# Altium PCB PCB_QH.PcbDoc
Units mm, origin at the board's own origin, x right, y up, seen from the top; angles counter-clockwise.
Board outline 180.28 x 98.81 mm, 2 copper layers (Top Layer, Bottom Layer); 73 components, 61 nets, 225 pads, 177 vias.
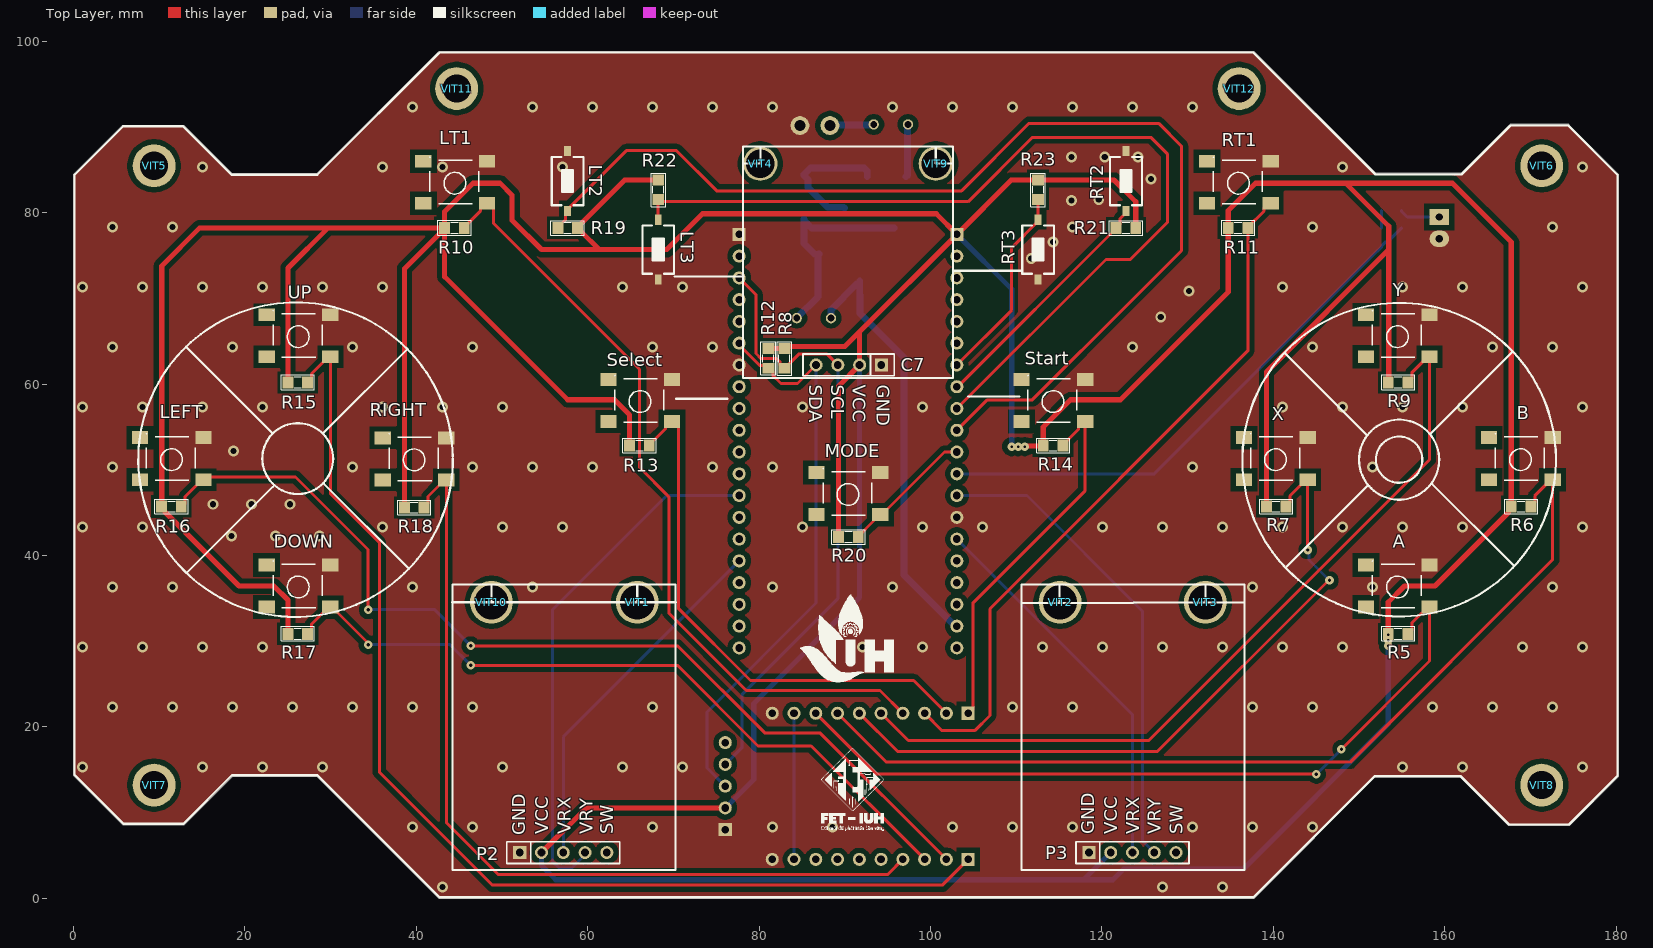
[diagram p0: Top Layer view]
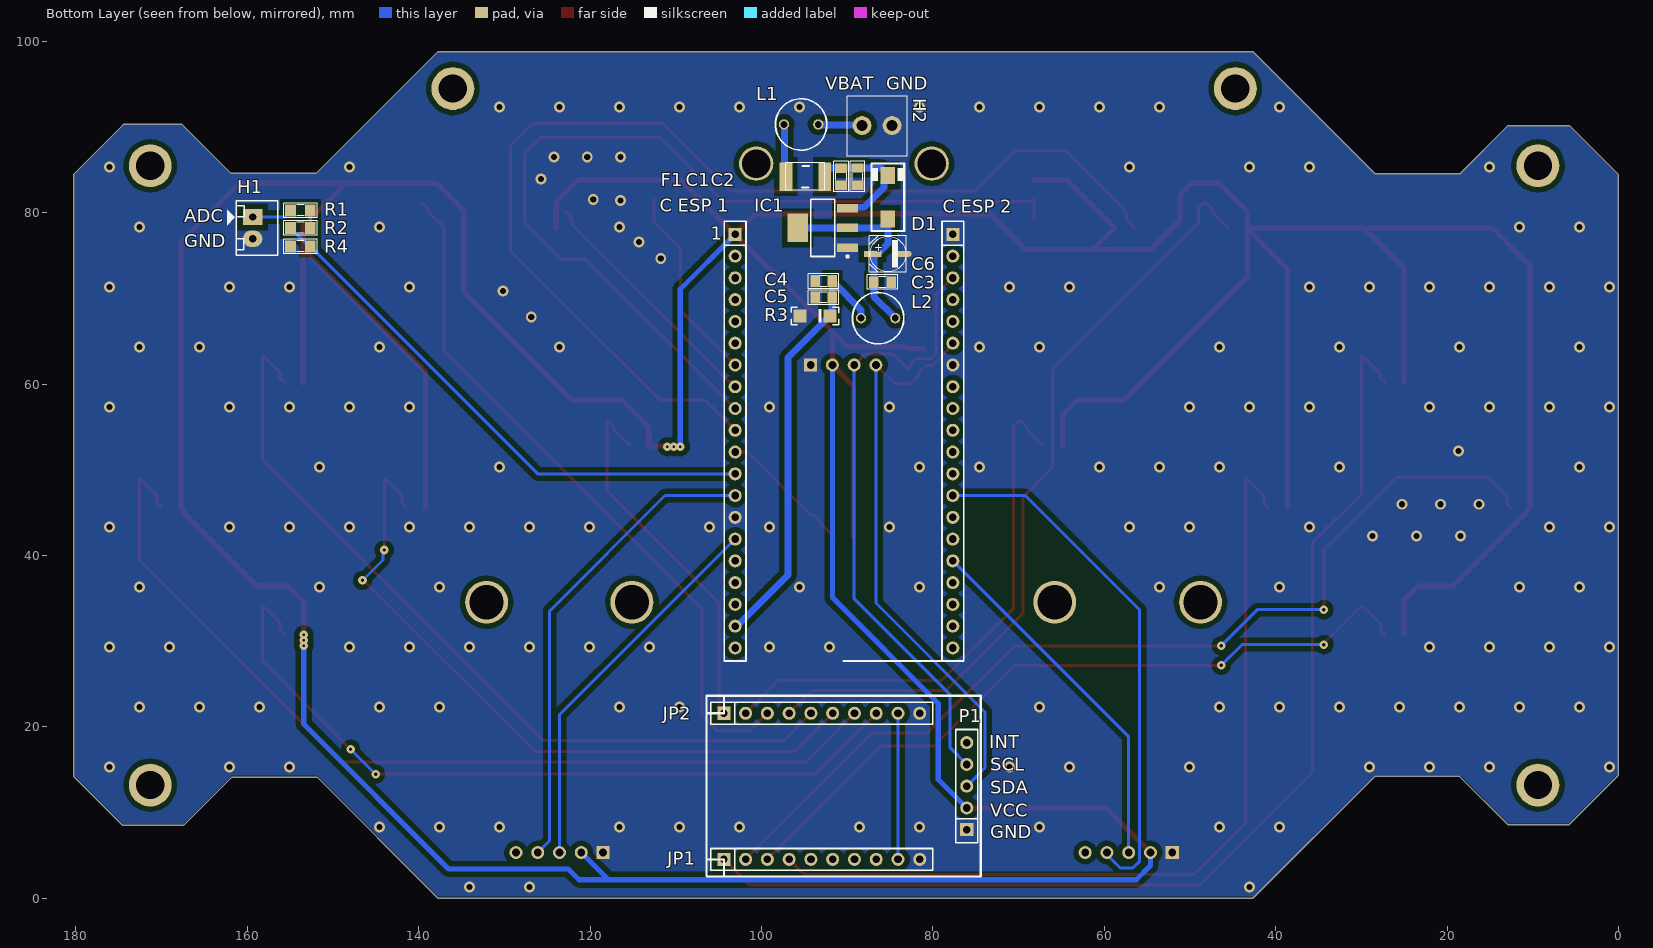
[diagram p1: Bottom Layer view, seen from below]
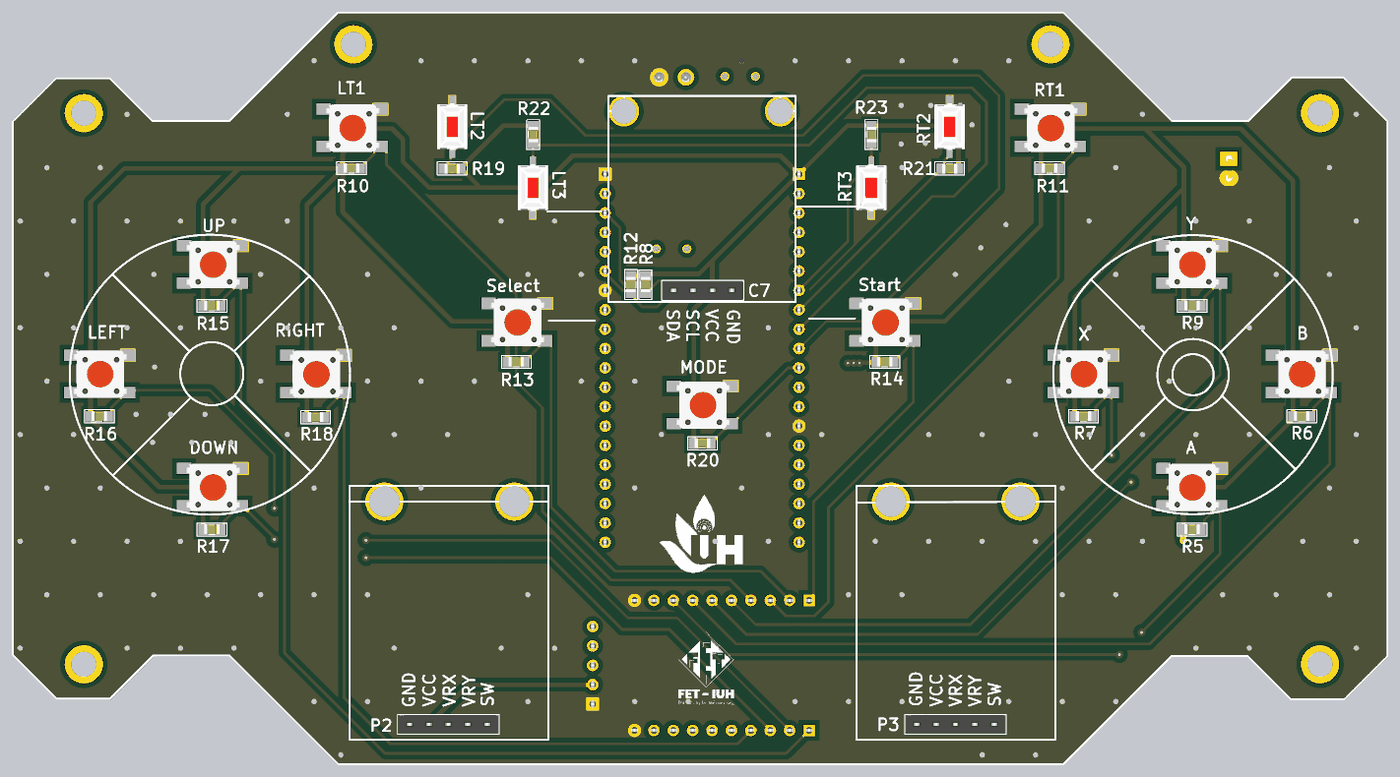
[diagram p2: 3D render of the assembled board from above, using the file's embedded part models]
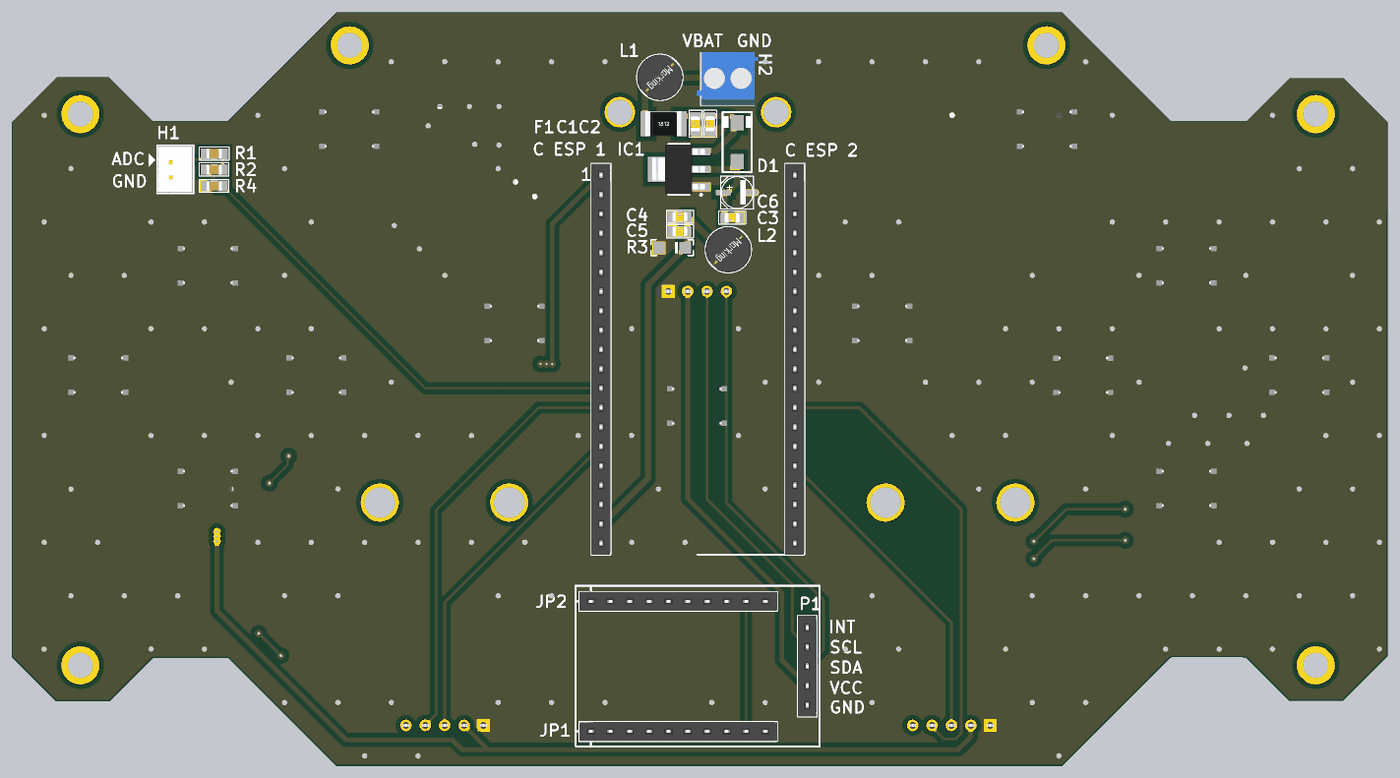
[diagram p3: 3D render of the assembled board from below, using the file's embedded part models]

## Layer stack, top to bottom
Top Solder: solder mask 0.0102, Solder Resist, Dk 3.5
Top Layer: signal copper 0.0356
Dielectric 1: dielectric 0.32, FR-4, Dk 4.8
Bottom Layer: signal copper 0.0356
Bottom Solder: solder mask 0.0102, Solder Resist, Dk 3.5

## Board outline
5.764,8.587 12.905,8.587 18.542,14.224 28.448,14.224 42.672,0 137.733,0 151.882,14.149 161.777,14.149 167.431,8.495 174.545,8.495 180.279,14.23 180.279,84.467 174.455,90.291 167.624,90.291 161.911,84.579 151.978,84.579 137.752,98.805 42.671,98.805 28.415,84.549 18.5,84.549 12.879,90.17 5.715,90.17 0,84.455 0,14.351

## Design rules (kind name [scope] priority, off if disabled: settings)
Clearance [All] p1: gap=0.16 ignorepadtopadclearanceinfootprint=FALSE
PolygonConnect PolygonConnect_11 [All vs IsNamedPolygon('GND_L02_P001')] p1: connectstyle=Direct reliefconductorwidth=0.254 reliefentries=4 polygonreliefangle="90 Angle" airgapwidth=0.254
PolygonConnect PolygonConnect_10 [All vs IsNamedPolygon('GND_L01_P000')] p2: connectstyle=Direct reliefconductorwidth=0.254 reliefentries=4 polygonreliefangle="90 Angle" airgapwidth=0.254
PolygonConnect PolygonConnect_9 [All vs IsNamedPolygon('GND_L02_P001')] p3: connectstyle=Direct reliefconductorwidth=0.254 reliefentries=4 polygonreliefangle="90 Angle" airgapwidth=0.254
PolygonConnect PolygonConnect_8 [All vs IsNamedPolygon('GND_L01_P000')] p4: connectstyle=Direct reliefconductorwidth=0.254 reliefentries=4 polygonreliefangle="90 Angle" airgapwidth=0.254
PolygonConnect PolygonConnect_7 [All vs IsNamedPolygon('GND_L01_P000')] p5: connectstyle=Direct reliefconductorwidth=0.254 reliefentries=4 polygonreliefangle="90 Angle" airgapwidth=0.254
PolygonConnect PolygonConnect_6 [All vs IsNamedPolygon('GND_L01_P000')] p6: thpad.connectstyle=Direct thpad.reliefconductorwidth=0.254 thpad.reliefentries=4 thpad.polygonreliefangle="90 Angle" thpad.airgapwidth=0.254 smdpad.connectstyle=Direct smdpad.reliefconductorwidth=0.254 smdpad.reliefentries=4 smdpad.polygonreliefangle="90 Angle" smdpad.airgapwidth=0.254 via.connectstyle=Relief via.reliefconductorwidth=0.254 via.reliefentries=4 via.polygonreliefangle="90 Angle" via.airgapwidth=0.254
PolygonConnect 1 [All vs IsNamedPolygon('GND_L01_P000')] p7: thpad.connectstyle=Direct thpad.reliefconductorwidth=0.254 thpad.reliefentries=4 thpad.polygonreliefangle="90 Angle" thpad.airgapwidth=0.254 smdpad.connectstyle=Direct smdpad.reliefconductorwidth=0.254 smdpad.reliefentries=4 smdpad.polygonreliefangle="90 Angle" smdpad.airgapwidth=0.254 via.connectstyle=Relief via.reliefconductorwidth=0.254 via.reliefentries=4 via.polygonreliefangle="90 Angle" via.airgapwidth=0.254
PolygonConnect PolygonConnect_5 [All vs IsNamedPolygon('GND_L01_P000')] p8: thpad.connectstyle=Direct thpad.reliefconductorwidth=0.254 thpad.reliefentries=4 thpad.polygonreliefangle="90 Angle" thpad.airgapwidth=0.254 smdpad.connectstyle=Direct smdpad.reliefconductorwidth=0.254 smdpad.reliefentries=4 smdpad.polygonreliefangle="90 Angle" smdpad.airgapwidth=0.254 via.connectstyle=Relief via.reliefconductorwidth=0.254 via.reliefentries=4 via.polygonreliefangle="90 Angle" via.airgapwidth=0.254
PolygonConnect PolygonConnect_4 [All vs IsNamedPolygon('GND_L02_P001')] p9: thpad.connectstyle=Direct thpad.reliefconductorwidth=0.254 thpad.reliefentries=4 thpad.polygonreliefangle="90 Angle" thpad.airgapwidth=0.254 smdpad.connectstyle=Direct smdpad.reliefconductorwidth=0.254 smdpad.reliefentries=4 smdpad.polygonreliefangle="90 Angle" smdpad.airgapwidth=0.254 via.connectstyle=Relief via.reliefconductorwidth=0.254 via.reliefentries=4 via.polygonreliefangle="90 Angle" via.airgapwidth=0.254
PolygonConnect PolygonConnect_3 [All vs IsNamedPolygon('GND_L01_P000')] p10: thpad.connectstyle=Direct thpad.reliefconductorwidth=0.254 thpad.reliefentries=4 thpad.polygonreliefangle="90 Angle" thpad.airgapwidth=0.254 smdpad.connectstyle=Direct smdpad.reliefconductorwidth=0.254 smdpad.reliefentries=4 smdpad.polygonreliefangle="90 Angle" smdpad.airgapwidth=0.254 via.connectstyle=Relief via.reliefconductorwidth=0.254 via.reliefentries=4 via.polygonreliefangle="90 Angle" via.airgapwidth=0.254
PolygonConnect PolygonConnect_2 [All vs IsNamedPolygon('GND_L02_P001')] p11: thpad.connectstyle=Direct thpad.reliefconductorwidth=0.254 thpad.reliefentries=4 thpad.polygonreliefangle="90 Angle" thpad.airgapwidth=0.254 smdpad.connectstyle=Direct smdpad.reliefconductorwidth=0.254 smdpad.reliefentries=4 smdpad.polygonreliefangle="90 Angle" smdpad.airgapwidth=0.254 via.connectstyle=Relief via.reliefconductorwidth=0.254 via.reliefentries=4 via.polygonreliefangle="90 Angle" via.airgapwidth=0.254
PolygonConnect PolygonConnect_1 [All vs IsNamedPolygon('GND_L01_P000')] p12: thpad.connectstyle=Direct thpad.reliefconductorwidth=0.254 thpad.reliefentries=4 thpad.polygonreliefangle="90 Angle" thpad.airgapwidth=0.254 smdpad.connectstyle=Direct smdpad.reliefconductorwidth=0.254 smdpad.reliefentries=4 smdpad.polygonreliefangle="90 Angle" smdpad.airgapwidth=0.254 via.connectstyle=Relief via.reliefconductorwidth=0.254 via.reliefentries=4 via.polygonreliefangle="90 Angle" via.airgapwidth=0.254
PolygonConnect [All] p13: connectstyle=Relief reliefconductorwidth=0.254 reliefentries=4 polygonreliefangle="90 Angle" airgapwidth=0.254
RoutingVias [All] p1: holewidth=0.711 width=1.27 viastyle="Through Hole" minholewidth=0.711 minwidth=1.27 maxholewidth=0.711 maxwidth=1.27
SolderMaskExpansion [All] p1: expansion=0.102 istentingtop=FALSE
Width 3V3 [InNet('+3V3')] p1: maxlimit=0.8 minlimit=0.254 preferedwidth=0.6
Width [All] p2: maxlimit=0.8 minlimit=0.254 preferedwidth=0.35
30 further rules are at their usual default settings.

## Components (designator, comment, footprint, x,y, rotation, side; value= is the part's Value field where it differs from the comment)
A "SW" "SW4 - SMD" 157.734,34.163 r180 top value="Button chip 4 pin" (schematic designator A1)
B "SW" "SW4 - SMD" 172.093,49.022 r180 top value="Button chip 4 pin" (schematic designator B1)
C1 "10uF/25V" CN-SMD-0805 90.709,84.201 r90 bottom value=33pF
C2 "0.1uF/25V" CN-SMD-0805 88.804,84.217 r90 bottom value=33pF
C3 "0.1uF/16V" CN-SMD-0805 85.883,71.882 r0 bottom value=33pF
C4 "4.7uF/16V" CN-SMD-0805 92.741,72.009 r180 bottom value=33pF
C5 "0.1uF/16V" CN-SMD-0805 92.741,70.104 r180 bottom value=33pF
C6 "22uF/16V" CAP-ALU-SMD-5.5x5.5 85.248,75.184 r180 bottom
C7 "Header4" JP4-C1T 94.265,62.23 r180 top
"C ESP 1" "JP21" JP20-C1T 103.077,77.47 r270 bottom
"C ESP 2" "JP22" JP20-C1T 77.678,77.47 r270 bottom
D1 "1N5819/SS14" SMA 85.248,81.788 r90 bottom
DOWN "SW" "SW4 - SMD" 29.464,34.163 r180 top value="Button chip 4 pin" (schematic designator DPAD_DOWN1)
F1 "1.5A 5x20" RES-SMD-1812 95.154,84.201 r180 bottom value=Fuse
H1 "Header2" Header2 159.385,79.502 r270 bottom
H2 "Header2" KF2-3.5 86.518,90.17 r180 bottom
IC1 "AMS1117-5V" SOT223-4N 92.868,78.232 r0 bottom
JP1 "JP10" JP10-C1T 104.394,4.54 r180 bottom value="Connector 10"
JP2 "JP10" JP10-C1T 104.394,21.59 r180 bottom value="Connector 10"
L1 "Ferrite bead 3A" L-DIP-M-6.0 95.376,90.297 r0 bottom value="150 mH"
L2 "1000Ohm" L-DIP-M-6.0 86.391,67.691 r0 bottom value="150 mH"
LEFT "SW" "SW4 - SMD" 14.673,49.022 r180 top value="Button chip 4 pin" (schematic designator DPAD_LEFT1)
LT1 "SW" "SW4 - SMD" 47.752,81.28 r180 top value="Button chip 4 pin"
LT2 "SW" SW-SMD 57.658,83.693 r90 top value="SW chip 2 pin"
LT3 "SW" SW-SMD 68.23,75.692 r270 top value="SW chip 2 pin" (schematic designator CT1)
MODE "SW" "SW4 - SMD" 93.63,44.958 r180 top value="Button chip 4 pin" (schematic designator MODE1)
P1 "Header 5" JP5-C1T 76.049,8.001 r90 bottom
P2 "Header 5" JP5-C1T 52.07,5.334 r0 top
P3 "Header 5" JP5-C1T 118.491,5.334 r0 top
R1 "3k" SM-0805 153.797,80.264 r0 bottom value="R1/4W - 1K"
R2 "`3k" SM-0805 153.797,78.232 r180 bottom value="R1/4W - 1K"
R3 "Z 6.3V" 1N4148_SMD 93.757,67.945 r180 bottom
R4 "4k7" SM-0805 153.797,76.073 r180 bottom value="R1/4W - 1K"
R5 "330" SM-0805 154.559,30.861 r180 top value="R1/4W - 1K"
R6 "330" SM-0805 168.91,45.72 r180 top value="R1/4W - 1K"
R7 "330" SM-0805 140.335,45.72 r180 top value="R1/4W - 1K"
R8 "4k7" SM-0805 82.936,62.992 r90 top value="R1/4W - 1K"
R9 "330" SM-0805 154.559,60.198 r180 top value="R1/4W - 1K"
R10 "330" SM-0805 44.45,78.232 r180 top value="R1/4W - 1K"
R11 "330" SM-0805 135.89,78.232 r180 top value="R1/4W - 1K"
R12 "4k7" SM-0805 81.082,62.992 r270 top value="R1/4W - 1K"
R13 "330" SM-0805 66.04,52.832 r180 top value="R1/4W - 1K"
R14 "330" SM-0805 114.3,52.832 r180 top value="R1/4W - 1K"
R15 "330" SM-0805 26.162,60.198 r180 top value="R1/4W - 1K"
R16 "330" SM-0805 11.43,45.72 r180 top value="R1/4W - 1K"
R17 "330" SM-0805 26.162,30.861 r180 top value="R1/4W - 1K"
R18 "330" SM-0805 39.751,45.593 r180 top value="R1/4W - 1K"
R19 "330" SM-0805 57.658,78.232 r0 top value="R1/4W - 1K"
R20 "330" SM-0805 90.424,42.164 r180 top value="R1/4W - 1K"
R21 "330" SM-0805 122.809,78.232 r0 top value="R1/4W - 1K"
R22 "330" SM-0805 68.23,82.677 r90 top value="R1/4W - 1K"
R23 "330" SM-0805 112.553,82.677 r90 top value="R1/4W - 1K"
RIGHT "SW" "SW4 - SMD" 42.994,48.997 r180 top value="Button chip 4 pin" (schematic designator DPAD_RIGHT1)
RT1 "SW" "SW4 - SMD" 139.192,81.28 r180 top value="Button chip 4 pin"
RT2 "SW" SW-SMD 122.809,83.693 r90 top value="SW chip 2 pin"
RT3 "SW" SW-SMD 112.553,75.692 r270 top value="SW chip 2 pin" (schematic designator CT2)
Select "SW" "SW4 - SMD" 69.342,55.804 r180 top value="Button chip 4 pin" (schematic designator Select1)
Start "SW" "SW4 - SMD" 117.543,55.804 r180 top value="Button chip 4 pin" (schematic designator Start1)
UP "SW" "SW4 - SMD" 29.464,63.373 r180 top value="Button chip 4 pin" (schematic designator DPAD_UP1)
VIT1 "1" VIT#1 65.786,34.544 r0 top
VIT2 "1" VIT#1 115.117,34.544 r0 top
VIT3 "1" VIT#1 132.08,34.544 r0 top
VIT4 "1" VIT#2 80.136,85.725 r0 top
VIT5 "1" VIT#3 9.398,85.471 r0 top
VIT6 "1" VIT#3 171.323,85.471 r0 top
VIT7 "1" VIT#3 9.398,13.208 r0 top
VIT8 "1" VIT#3 171.323,13.208 r0 top
VIT9 "1" VIT#2 100.615,85.725 r0 top
VIT10 "1" VIT#1 48.768,34.544 r0 top
VIT11 "1" VIT#3 44.704,94.488 r0 top
VIT12 "1" VIT#3 136.017,94.488 r0 top
X "SW" "SW4 - SMD" 143.518,49.022 r180 top value="Button chip 4 pin" (schematic designator X1)
Y "SW" "SW4 - SMD" 157.734,63.373 r180 top value="Button chip 4 pin" (schematic designator Y1)

## Footprints (in the part's own frame and the unit in brackets; to place one, negate y for a bottom-side part, rotate by r counter-clockwise, add the part's x,y. Pads: shape width x height; smd on the part's side, far side on the other; paste and mask are expansions set on the pad)
1N4148_SMD [mil]
  rect 60x60 smd: 1(-67.91,0) 2(67.91,0)
  silkscreen extent -109,-40 109,41, body extent -71,-23 67,25, height 47
CAP-ALU-SMD-5.5x5.5 [mm]
  rect 2x0.7 smd: 1(-1.778,0)
  oval 2x0.7 smd: 2(1.778,0)
  silkscreen extent -2.15,-2.15 2.15,2.15, body extent -2.3,-2.15 2.3,2.15, height 5.4
CN-SMD-0805 [mm]
  rect 1.1x1.397 smd: 1(-1,0) 2(1,0)
  silkscreen extent -1.78,-0.86 1.78,0.84, body extent -1,-0.62 1,0.63, height 0.8
Header2 [mil] "CON2"
  rect 75x90 hole 34: 1(0,0)
  oval 75x90 hole 34: 2(100,0)
  silkscreen extent -75,-118 175,115, body extent -68,-70 168,107, height 236
JP4-C1T [mm] "4 row, straight, gold plating"
  rect 1.52x1.52 hole 0.9: 1(0,0)
  round 1.52 hole 0.9: 2(2.54,0) 3(5.08,0) 4(7.62,0)
  silkscreen extent -1.52,-1.27 9.14,1.27, body extent -1.52,-1.25 9.14,1.25, height 8.51
JP5-C1T [mm] "5 row, straight, gold plating"
  rect 1.52x1.52 hole 0.9: 1(0,0)
  round 1.52 hole 0.9: 2(2.54,0) 3(5.08,0) 4(7.62,0) 5(10.16,0)
  silkscreen extent -1.52,-1.27 11.68,1.27, body extent -1.52,-1.25 11.68,1.25, height 8.51
JP10-C1T [mm] "10 row, straight, gold plating"
  rect 1.52x1.52 hole 0.9: 1(0,0)
  round 1.52 hole 0.9: 2(2.54,0) 3(5.08,0) 4(7.62,0) 5(10.16,0) 6(12.7,0) 7(15.24,0) 8(17.78,0) 9(20.32,0) 10(22.86,0)
  silkscreen extent -1.52,-1.27 24.38,1.27, body extent -1.52,-1.25 24.38,1.25, height 8.51
JP20-C1T [mm] "20 row, straight, gold plating"
  rect 1.52x1.52 hole 0.9: 1(0,0)
  round 1.52 hole 0.9: 2(2.54,0) 3(5.08,0) 4(7.62,0) 5(10.16,0) 6(12.7,0) 7(15.24,0) 8(17.78,0) 9(20.32,0) 10(22.86,0) 11(25.4,0) 12(27.94,0) 13(30.48,0) 14(33.02,0) 15(35.56,0) 16(38.1,0) 17(40.64,0) 18(43.18,0) 19(45.72,0) 20(48.26,0)
  silkscreen extent -1.52,-1.27 49.78,1.27, body extent -1.52,-1.25 49.78,1.25, height 8.51
KF2-3.5 [mm] "3,50mm - modular - blue - Horizontal wire entry - Pressure clamp - 8,4mm height - 02p"
  round 2.2 hole 1.3: 1(-1.75,0) 2(1.75,0)
  silkscreen extent -3.5,-3.6 3.5,3.4, body extent -3.95,-3.6 4.05,3.4, height 8.41
L-DIP-M-6.0 [mm] "THT Inductor, 2-Leads, Body 6,0  mm"
  round 1.2 hole 0.8: 1(-2,0) 2(2,0)
  silkscreen extent -3,-3 3,3, body extent -4.17,-4.17 4.17,4.17, height 6.51
RES-SMD-1812 [mm] "Chip Capacitor, Body 3.2x2.5mm, IPC Medium Density"
  rect 1.5x3.3 smd: 1(-1.996,0) 2(2.54,0)
  silkscreen extent -2.04,-1.6 2.54,1.6, body extent -2,-1.6 2.5,1.6, height 0.6
SM-0805 [mil] "Compoment SMD 80x50mil"
  rect 50x55 smd: 1(-45,0) 2(45,0)
  silkscreen extent -77,-34 76,33, body extent -40,-27 40,23, height 24
SMA [mm]
  rect 2x1.7 smd: 1(-2.544,0) 2(2.544,0)
  silkscreen extent -3.94,-1.9 3.94,1.91, body extent -2.87,-1.4 2.87,1.4, height 2.29
SOT223-4N [mm] "SOT223, 4-Leads, Body 6.5x3.5mm, Pitch 2.3mm, Lead Span 7mm, IPC Medium Density"
  rect 2.4x1 smd: 1(-2.9,2.3) 2(-2.9,0) 3(-2.9,-2.3)
  rect 2.4x3.3 smd: 4(2.9,0)
  silkscreen extent -3.02,-3.35 1.4,3.47, body extent -3.39,-3.27 3.5,3.23, height 1.72
"SW4 - SMD" [mm] "SW button 4pin, 250 x250 mil"
  rect 1.905x1.5 smd: 1(-0.5,0.178) 2(6.926,0.178) 3(-0.5,-4.724) 4(6.926,-4.724)
  silkscreen extent 0.46,-5.21 6.17,0.25, body extent -0.83,-5.33 7.07,0.87, height 7
SW-SMD [mm] "Switch SMD type"
  rect 1.2x0.8 smd: 1(-3.5,0) 2(3.5,0)
  silkscreen extent -2.82,-1.85 2.82,1.85, body extent -3.05,-1.85 3.05,1.85, height 2.5
VIT#1 [mm] "VIT"
  round 5 hole 4: VIT1(0,0)
VIT#2 [mm] "VIT"
  round 4 hole 3.3: VIT1(0,0)
VIT#3 [mm] "VIT"
  round 5 hole 3.3: VIT1(0,0)

## Part data
A B DOWN LEFT LT1 MODE RIGHT RT1 Select Start UP X Y: library part SW4, "Switch button 4 pin"
C1 C2 C3 C4 C5: library part CN
C6: library part CN-ALU-SMD, "Polarized Capacitor (Axial)", LatestRevisionDate=17-Jul-2002, LatestRevisionNote="Re-released for DXP Platform.", PackageReference=POLAR0.8, Published=8-Jun-2000, Publisher="Altium Limited"
C7: "Header IDC, 4 x 1 Pin Vertical 2.54mm Pitch (Non-Boxed, Male)", Manufacturer="W¨¹rth Elektronik eiSos GmbH", partNo=613002143121, ComponentLink1 Description=Manufacturer, ComponentLink1URL=http://www.we-online.com, ComponentLink2 Description=Datasheet, ComponentLink2URL=http://katalog.we-online.de/em/datasheet/6130xx143121.pdf, Created by="Karrer Zheng", Created Date="29 March 2013", NoPins=02
"C ESP 1" "C ESP 2": library part JP20, "WR-PHD 2.54 mm Angled Socket Header", Manufacturer="W¨¹rth Elektronik eiSos GmbH", partNo=613020143121, ComponentLink1 Description=Manufacturer, ComponentLink1URL=http://www.we-online.com, ComponentLink2 Description=Datasheet, ComponentLink2URL=http://katalog.we-online.de/em/datasheet/6130xx143121.pdf, Created by="Karrer Zheng", Created Date="29 March 2013", NoPins=20
D1: library part "Diode Zener SMD"
F1: library part Fuse, "Fuse", Designed by=VanDungEvn
H1 H2: "Header IDC, 2 x 1 Pin Vertical 2.54mm Pitch (Non-Boxed, Male)", Manufacturer="W¨¹rth Elektronik eiSos GmbH", partNo=613002143121, ComponentLink1 Description=Manufacturer, ComponentLink1URL=http://www.we-online.com, ComponentLink2 Description=Datasheet, ComponentLink2URL=http://katalog.we-online.de/em/datasheet/6130xx143121.pdf, Created by="Karrer Zheng", Created Date="29 March 2013", NoPins=02
IC1: library part LM1117, "800mA Low-Dropout Linear Regulator", Creator="Nguyen Ba Bien", Website=http://group3i.net
JP1 JP2: library part Header10, "Connector 10"
L1: library part L-DIP-1, "Inductor"
L2: library part "Inductor Ferit", "Inductor"
LT2 LT3 RT2 RT3: library part SW2, "Switch button 2 pin"
P1 P2 P3: "Header, 5-Pin", LatestRevisionDate=17-Jul-2002, LatestRevisionNote="Re-released for DXP Platform.", Publisher="Altium Limited"
R1 R2 R4 R5 R6 R7 R8 R9 R10 R11 R12 R13 R14 R15 R16 R17 R18 R19 R20 R21 R22 R23: library part RES, "Resistor 1/4W"
R3: library part "DIODE Zener", "Zenner 4.8V"
VIT1 VIT2 VIT3 VIT4 VIT5 VIT6 VIT7 VIT8 VIT9 VIT10 VIT11 VIT12: library part VIT, "Oc Vit"

## Via types
v1: diameter 1.27, hole 0.711, Top Layer to Bottom Layer, tented both sides, 163 vias
v2: diameter 1, hole 0.4, Top Layer to Bottom Layer, tented both sides, 8 vias
v3: diameter 1, hole 0.3, Top Layer to Bottom Layer, 3 vias
v4: diameter 1, hole 0.3, Top Layer to Bottom Layer, tented both sides, 3 vias

## Nets (pads, with @x,y where several pads share a name; then routed paths per layer and width w, separated by ;. In a path a pad name is that pad's centre, name@x,y a point inside that pad or via, vN(x,y) a via of type N, cw(c..) or ccw(c..) an arc to the next point about the centre after c; other vN are vias at no path point)
+3V3: "C ESP 1.1" C7.2 P1.2 P2.2 P3.2 R5.2 R6.2 R7.2 R8.2 R9.2 R10.2 R11.2 R12.1 R13.2 R14.2 R15.2 R16.2 R17.2 R18.2 R19.2 R20.2 R21.2 R22.2 R23.2 | length 771.5
  Top Layer w0.6: R17.2 25.019,34.798 23.368,36.449 19.304,36.449 10.622,45.131 10.622,45.385 R16.2 10.287,73.787 14.732,78.232 29.718,78.232 ; R15.2 25.019,73.533 29.718,78.232 ; R18.2 38.608,73.469 R10.2@43.307,78.168 ; P2.2 59.817,10.541 P1.2 ; R13.2 64.897,56.388 63.119,58.166 57.658,58.166 43.307,72.517 R10.2@43.307,78.168 ; R22.2 64.326,83.82 58.801,78.295 R19.2 58.801,78.168 59.136,77.833 59.2,77.833 61.341,75.692 ; R12.1 R8.2 83.19,64.389 89.996,64.389 91.725,66.118 ; R20.2 89.281,59.786 C7.2 91.725,66.118 ; v4(110.998,52.705) 111.061,52.768 113.094,52.768 R14.2 113.157,54.991 116.332,58.166 122.174,58.166 134.747,70.739 R11.2 134.747,80.264 137.922,83.439 148.463,83.439 ; R21.2 123.952,81.28 121.412,83.82 R23.2 109.427,83.82 103.077,77.47 ; R7.2@139.192,45.593 139.192,61.404 153.48,75.692 ; R5.2 153.416,34.544 155.321,36.449 158.877,36.449 167.432,45.004 167.432,45.385 R6.2 167.767,76.581 160.909,83.439 148.463,83.439 ; R9.2@153.48,60.134 153.48,75.692 ; 29.718,78.232 R10.2 ; R10.2@43.307,78.168 R10.2 ; R10.2 43.307,80.137 46.609,83.439 49.784,83.439 51.181,82.042 51.181,79.121 54.61,75.692 61.341,75.692 ; 61.341,75.692 69.215,75.692 73.406,79.883 100.664,79.883 103.077,77.47 ; 91.725,66.118 103.077,77.47 ; 148.463,83.439 153.48,78.422 153.48,75.692
  Bottom Layer w0.6: P2.2 54.61,3.81 56.261,2.159 117.856,2.159 ; P1.2 79.375,13.867 79.375,22.733 91.725,35.083 C7.2 ; 103.077,77.47 109.474,71.073 v4(109.474,52.705) ; P3.2 117.856,2.159 ; v3(153.416,30.734) 153.416,20.32 136.525,3.429 122.555,3.429 121.285,2.159 117.856,2.159
  other v3: 153.416,29.464 153.416,30.099
  other v4: 110.236,52.705
+5V: "C ESP 1.19" C4.2 C5.2 L2.2 R3.2 | length 50.7
  Bottom Layer w0.8: L2.2 88.391,68.659 91.442,71.711 91.591,71.711 C4.2@91.741,71.861 ; C4.2 C4.2@91.741,71.861 ; 103.077,31.75 102.882,31.75 96.901,37.731 96.901,63.076 91.758,68.219 91.758,70.378 91.741,70.395 C4.2@91.741,71.861
EN: "C ESP 1.2"
GND: "C ESP 1.14" "C ESP 2.1" "C ESP 2.7" A.3 B.3 C1.1 C2.1 C3.1 C4.1 C5.1 C6.2 C7.1 DOWN.3 H1.2 H2.2 IC1.1 JP1.10 JP2.10 LEFT.3 LT1.3 LT2.2 LT3.2 MODE.3 P1.1 P2.1 P3.1 R3.1 R4.1 RIGHT.3 RT1.3 RT2.2 RT3.2 Select.3 Start.3 UP.3 X.3 Y.3
  other v1: 43.062,1.33 127.062,1.33 134.062,1.33 39.562,8.33 46.562,8.33 67.562,8.33 81.562,8.33 88.562,8.33 102.562,8.33 109.562,8.33 116.562,8.33 130.562,8.33 137.562,8.33 144.562,8.33 1.062,15.33 15.062,15.33 22.062,15.33 29.062,15.33 50.062,15.33 64.062,15.33 71.062,15.33 155.062,15.33 162.062,15.33 176.062,15.33 4.562,22.33 11.562,22.33 18.562,22.33 25.562,22.33 32.562,22.33 39.562,22.33 46.562,22.33 67.562,22.33 109.562,22.33 116.562,22.33 137.562,22.33 144.562,22.33 158.562,22.33 165.562,22.33 172.562,22.33 1.062,29.33 8.062,29.33 15.062,29.33 22.062,29.33 92.062,29.33 99.062,29.33 113.062,29.33 120.062,29.33 127.062,29.33 134.062,29.33 141.062,29.33 148.062,29.33 169.062,29.33 176.062,29.33 4.562,36.33 11.562,36.33 39.562,36.33 53.562,36.33 81.562,36.33 95.562,36.33 137.562,36.33 151.562,36.33 172.562,36.33 18.415,42.291 23.558,42.291 28.702,42.291 1.062,43.33 8.062,43.33 36.062,43.33 50.062,43.33 57.062,43.33 85.062,43.33 99.062,43.33 106.062,43.33 120.062,43.33 127.062,43.33 134.062,43.33 141.062,43.33 148.062,43.33 155.062,43.33 162.062,43.33 176.062,43.33 16.256,45.974 20.764,45.974 25.273,45.974 4.562,50.33 32.562,50.33 46.562,50.33 53.562,50.33 60.562,50.33 74.562,50.33 81.562,50.33 130.562,50.33 151.562,50.33 18.669,52.197 1.062,57.33 8.062,57.33 15.062,57.33 22.062,57.33 36.062,57.33 43.062,57.33 50.062,57.33 85.062,57.33 99.062,57.33 141.062,57.33 148.062,57.33 155.062,57.33 162.062,57.33 176.062,57.33 4.562,64.33 18.562,64.33 32.562,64.33 46.562,64.33 67.562,64.33 74.562,64.33 123.562,64.33 144.562,64.33 165.562,64.33 172.562,64.33 126.873,67.818 130.175,70.866 1.062,71.33 8.062,71.33 15.062,71.33 22.062,71.33 29.062,71.33 36.062,71.33 64.062,71.33 71.062,71.33 141.062,71.33 155.062,71.33 162.062,71.33 176.062,71.33 111.76,74.676 114.3,76.581 4.562,78.33 11.562,78.33 116.562,78.33 144.562,78.33 172.562,78.33 116.459,81.407 119.634,81.534 125.73,83.947 15.062,85.33 36.062,85.33 43.062,85.33 57.062,85.33 148.062,85.33 176.062,85.33 116.459,86.487 120.332,86.487 124.206,86.487 39.562,92.33 53.562,92.33 60.562,92.33 67.562,92.33 74.562,92.33 81.562,92.33 95.562,92.33 102.562,92.33 109.562,92.33 116.562,92.33 123.562,92.33 130.562,92.33
GPIO0: "C ESP 2.14"
GPIO2: "C ESP 2.15"
GPIO4: "C ESP 2.13" P2.4 | length 61.7
  Bottom Layer w0.35: P2.4 59.69,5.08 58.166,3.556 56.642,3.556 55.875,4.323 55.875,33.65 69.215,46.99 77.678,46.99
GPIO5: "C ESP 2.10"
GPIO6: "C ESP 2.19"
GPIO7: "C ESP 2.18"
GPIO8: "C ESP 2.17"
GPIO11: "C ESP 1.18"
GPIO12: "C ESP 1.13" P3.4 | length 56
  Bottom Layer w0.35: 103.077,46.99 111.252,46.99 124.714,33.528 124.714,6.731 P3.4
GPIO13: "C ESP 1.15" P3.3 | length 45.1
  Bottom Layer w0.35: 103.077,41.91 123.571,21.416 P3.3
GPIO14: "C ESP 1.12" R2.1 R4.2 | length 63.9
  Bottom Layer w0.35: 103.077,49.53 126.111,49.53 152.131,75.55 152.194,75.55 152.654,76.01 R4.2 152.654,76.136 153.114,76.596 153.368,76.596 154.94,78.168 R2.1
GPIO15: "C ESP 2.16" P2.3 | length 42.5
  Bottom Layer w0.35: P2.3 57.15,18.842 77.678,39.37
GPIO18: "C ESP 2.9"
GPIO19: "C ESP 2.8"
GPIO23: "C ESP 2.2"
GPIO25: "C ESP 1.9" LT3.1 R22.1 | length 107.3
  Top Layer w0.35: LT3.1 R22.1 68.484,81.28 104.394,81.28 111.913,88.799 125.704,88.799 127.635,86.868 127.635,78.867 123.317,74.549 120.476,74.549 103.077,57.15
GPIO26: "C ESP 1.10" LT2.1 R19.1 | length 130.5
  Top Layer w0.35: R19.1 56.515,78.295 57.433,79.213 57.433,79.968 LT2.1 57.658,80.393 64.501,87.235 70.372,87.235 75.057,82.55 103.632,82.55 111.506,90.424 126.619,90.424 129.286,87.757 129.286,75.565 123.444,69.723 111.887,58.166 106.633,58.166 103.077,54.61
GPIO27: "C ESP 1.11" MODE.1 R20.1 | length 15.8
  Top Layer w0.35: R20.1 91.567,42.227 93.352,44.013 93.352,44.205 93.927,44.78 MODE.1 94.332,44.78 101.622,52.07 103.077,52.07
GPIO32: "C ESP 1.7" R23.1 RT3.1 | length 23.2
  Top Layer w0.35: 103.077,62.23 109.474,68.627 109.474,75.913 112.553,78.992 RT3.1 R23.1
GPIO33: "C ESP 1.8" R21.1 RT2.1 | length 28.7
  Top Layer w0.35: 103.077,59.69 103.188,59.69 121.41,77.912 121.41,77.976 122.126,78.692 122.126,79.31 122.809,79.993 RT2.1
GPIO34: "C ESP 1.5"
GPIO35: "C ESP 1.6"
GPIO36: "C ESP 1.3"
GPIO39: "C ESP 1.4"
"I2C SCL": "C ESP 2.3" C7.3 P1.4 R8.1 | length 73.4
  Top Layer w0.35: 77.678,72.39 79.629,70.439 79.629,63.565 80.202,62.992 82.042,62.992 82.413,62.621 82.413,62.309 82.873,61.849 R8.1 83,61.849 84.677,63.527 87.888,63.527 C7.3
  Bottom Layer w0.35: P1.4 77.978,17.55 77.978,23.749 89.185,34.956 C7.3
"I2C SDA": "C ESP 2.6" C7.4 P1.3 R12.2 | length 67.5
  Top Layer w0.35: 77.678,64.77 77.678,64.562 80.064,62.176 80.818,62.176 81.606,61.389 81.606,61.015 82.55,60.071 84.486,60.071 C7.4
  Bottom Layer w0.35: P1.3 73.914,15.216 73.914,21.717 86.645,34.448 C7.4
INT: P1.5
NetC1_2: C1.2 C2.2 D1.2 F1.2 IC1.3 | length 15.3
  Bottom Layer w0.8: D1.2 85.698,83.882 85.698,82.958 88.024,80.632 89.868,80.632 IC1.3 ; D1.2@85.248,84.482 85.983,85.217 C2.2 88.812,85.209 90.701,85.209 C1.2 92.264,85.201 92.614,84.851 F1.2
NetC3_2: C3.2 C6.1 D1.1 IC1.2 IC1.4 L2.1 | length 24.1
  Bottom Layer w0.8: L2.1 86.883,70.183 C3.2 86.883,75.134 86.933,75.184 C6.1 ; D1.1 D1.1@85.248,79.094 ; C6.1@86.476,75.184 85.248,76.412 D1.1@85.248,79.094 ; IC1.4 IC1.2 86.11,78.232 D1.1@85.248,79.094
NetF1_1: F1.1 L1.2 | length 6.2
  Bottom Layer w0.8: F1.1 97.299,84.351 97.299,90.22 L1.2
NetH1_1: H1.1 R1.2 | length 4.8
  Bottom Layer w0.35: R1.2 154.94,80.2 155.638,79.502 H1.1
NetR1_1: R1.1 R2.2 | length 2
  Bottom Layer w0.35: R2.2 R1.1
P00: A.1 JP2.8 R5.1 | length 90.5
  Top Layer w0.35: JP2.8@86.614,21.336 JP2.8 93.726,14.478 v2@144.653,14.478 ; v2(147.955,17.399) 158.234,27.678 A.1 158.031,33.985 156.162,32.116 156.162,31.321 R5.1
  Bottom Layer w0.35: v2(145.034,14.478) v2(147.955,17.399)
P01: B.1 JP2.7 R6.1 | length 109.2
  Top Layer w0.35: JP2.7 94.869,15.875 148.971,15.875 172.593,39.497 B.1 172.391,48.844 170.513,46.967 170.513,46.18 R6.1
P02: JP2.6 R7.1 X.1 | length 82.3
  Top Layer w0.35: JP2.6 96.139,17.145 126.492,17.145 146.431,37.084 v2(146.558,37.084) v2@146.685,37.084 ; R7.1 141.938,46.18 141.938,46.967 X.1@143.764,48.793 ; v2(144.018,40.64) 144.018,48.539 X.1@143.764,48.793 ; X.1 143.816,48.844 X.1@143.764,48.793
  Bottom Layer w0.35: v2(144.018,40.64) 144.162,40.496 144.162,39.48 v2(146.558,37.084)
P03: JP2.5 R9.1 Y.1 | length 95.1
  Top Layer w0.35: JP2.5 97.409,18.415 125.476,18.415 158.234,51.173 Y.1 158.031,63.195 156.162,61.326 156.162,60.658 R9.1
P04: JP2.4 LT1.1 R10.1 | length 93
  Top Layer w0.35: R10.1 45.593,78.295 47.474,80.177 47.474,80.527 48.049,81.102 LT1.1 48.454,81.102 49.029,80.527 49.029,78.733 66.04,61.722 66.04,50.292 69.469,46.863 69.469,33.274 78.486,24.257 94.107,24.257 JP2.4
P05: JP2.3 R11.1 RT1.1 | length 82.7
  Top Layer w0.35: JP2.3 101.346,19.558 105.156,19.558 106.934,21.336 106.934,33.782 137.033,63.881 137.033,78.295 138.914,80.177 138.914,80.527 139.489,81.102 RT1.1
P06: JP2.2 R13.1 Select.1 | length 62.6
  Top Layer w0.35: R13.1 67.183,52.895 69.064,54.777 69.064,55.051 69.639,55.626 70.037,55.626 70.612,55.051 70.612,33.782 78.994,25.4 98.044,25.4 JP2.2
P07: JP2.1 R14.1 Start.1 | length 43.7
  Top Layer w0.35: JP2.1 104.979,22.175 104.979,34.494 118.043,47.558 Start.1 117.841,55.626 117.266,55.051 117.266,54.718 115.443,52.895 R14.1
P10: JP1.1 R15.1 UP.1 | length 130.5
  Top Layer w0.35: R15.1 27.765,60.658 27.765,61.199 29.761,63.195 UP.1 29.972,63.187 29.972,47.244 35.687,41.529 35.687,14.732 48.895,1.524 101.378,1.524 JP1.1
P11: JP1.2 LEFT.1 R16.1 | length 113.8
  Top Layer w0.35: R16.1@12.573,45.593 13.033,46.053 13.033,46.881 15.301,49.149 25.908,49.149 34.367,40.69 v2(34.367,33.67) ; v2(46.355,29.464) 70.485,29.464 80.645,19.304 87.09,19.304 JP1.2
  Bottom Layer w0.35: v2(34.367,33.67) 42.149,33.67 v2(46.355,29.464)
P12: DOWN.1 JP1.3 R17.1 | length 86
  Top Layer w0.35: R17.1 27.765,31.321 27.765,31.989 29.761,33.985 30.166,33.985 34.544,29.608 v2@34.544,29.591 ; v2@46.482,27.178 70.485,27.178 79.883,17.78 86.074,17.78 JP1.3
  Bottom Layer w0.35: v2(34.367,29.591) 43.942,29.591 v2(46.355,27.178)
P13: JP1.4 R18.1 RIGHT.1 | length 100.9
  Top Layer w0.35: R18.1 41.354,46.053 41.354,46.881 43.292,48.819 RIGHT.1 43.494,8.83 49.53,2.794 95.028,2.794 JP1.4
P14: JP1.5
P15: JP1.6
P16: JP1.7
P17: JP1.8
SW: 
u0RX: "C ESP 2.5"
u0TX: "C ESP 2.4"
u1RX: "C ESP 1.16"
u1TX: "C ESP 1.17"
u2RX: "C ESP 2.12"
u2TX: "C ESP 2.11"
VDD: JP1.9 JP2.9 | length 17.1
  Bottom Layer w0.35: JP1.9 JP2.9
VIN: H2.1 L1.1 | length 5.2
  Bottom Layer w0.8: H2.1 88.331,90.233 93.312,90.233 L1.1
pads on no net: "C ESP 1.20" "C ESP 2.20" A.2 A.4 B.2 B.4 DOWN.2 DOWN.4 LEFT.2 LEFT.4 LT1.2 LT1.4 MODE.2 MODE.4 P2.5 P3.5 RIGHT.2 RIGHT.4 RT1.2 RT1.4 Select.2 Select.4 Start.2 Start.4 UP.2 UP.4 VIT1.VIT1 VIT2.VIT1 VIT3.VIT1 VIT4.VIT1 VIT5.VIT1 VIT6.VIT1 VIT7.VIT1 VIT8.VIT1 VIT9.VIT1 VIT10.VIT1 VIT11.VIT1 VIT12.VIT1 X.2 X.4 Y.2 Y.4

## Polygon pours and split planes (outlines as drawn)
GND on Top Layer "GND_L01_P000" (solid, remove dead copper, pour order 0): 0.138,84.489 5.8,90.151 12.782,90.151 18.454,84.479 28.444,84.479 42.705,98.74 137.713,98.74 137.713,98.734 151.93,84.517 161.965,84.517 161.965,84.519 167.682,90.237 167.684,90.235 174.408,90.235 180.162,84.481 180.161,84.48 180.161,14.336 174.496,8.671 174.491,8.677 167.507,8.677 167.507,8.689 161.842,14.354 151.869,14.354 151.869,14.352 137.708,0.19 137.696,0.201 42.701,0.201 28.481,14.421 18.487,14.421 18.487,14.404 12.842,8.76 12.841,8.762 5.791,8.762 0.129,14.423
GND on Bottom Layer "GND_L02_P001" (solid, remove dead copper, pour order 1): 0.13,84.505 5.781,90.155 12.798,90.155 18.449,84.504 18.449,84.501 28.44,84.501 28.441,84.5 42.69,98.749 137.694,98.749 151.884,84.559 151.884,84.514 161.942,84.514 161.948,84.508 167.678,90.237 174.406,90.237 180.156,84.486 180.156,14.353 174.473,8.67 174.44,8.703 167.475,8.703 167.475,8.721 161.834,14.362 151.847,14.362 137.693,0.208 42.672,0.208 28.458,14.422 28.458,14.429 18.456,14.429 12.799,8.771 5.852,8.771 0.132,14.492 0.132,14.524

## Silkscreen, mask and mechanical layers (free items; w line width, h text height)
Top Overlay:
  drawing of 150 lines, arcs and shapes, not listed
  text "SDA" at 85.852,59.944 h1.52 r270
  text "SCL" at 88.392,59.944 h1.52 r270
  text "VCC" at 90.932,59.944 h1.52 r270
  text "GND" at 93.726,59.944 h1.52 r270
  text "VCC" at 55.372,7.493 h1.52 r90
  text "VRX" at 58.039,7.493 h1.52 r90
  text "VRY" at 60.579,7.493 h1.52 r90
  text "SW" at 62.992,7.493 h1.52 r90
  text "GND" at 119.126,7.493 h1.52 r90
  text "VCC" at 121.793,7.493 h1.52 r90
  text "VRX" at 124.333,7.493 h1.52 r90
  text "VRY" at 126.873,7.493 h1.52 r90
  text "SW" at 129.413,7.493 h1.52 r90
  text "GND" at 52.705,7.366 h1.52 r90
Bottom Overlay:
  lines w0.254: 74.422,23.54 74.422,2.54 106.34,2.54 ; 74.422,23.622 106.422,23.622 106.422,2.622 ; 78.994,27.686 90.424,27.686 ; 104.394,2.54 104.394,4.54 106.394,4.54 ; 104.394,23.59 104.394,21.59 106.426,21.59
  text "GND" at 85.471,94.361 h1.52
  text "VBAT" at 92.583,94.361 h1.52
  text "ADC" at 167.386,78.867 h1.52
  text "1" at 105.918,76.835 h1.52
  text "GND" at 167.386,75.946 h1.52
  text "INT" at 73.406,17.526 h1.52
  text "SCL" at 73.279,14.859 h1.52
  text "SDA" at 73.279,12.192 h1.52
  text "VCC" at 73.279,9.525 h1.52
  text "GND" at 73.279,6.985 h1.52
Mechanical 1:
  the board outline again, w0.254

## Text inside footprints (layer, text, board x,y; h text height)
C6: Bottom Overlay "+" at 86.848,75.509 h0.89